# Altium PCB water_heating_new.PcbDoc
Units mm, origin at the board's own origin, x right, y up, seen from the top; angles counter-clockwise.
Board outline 33.27 x 58.67 mm, 2 copper layers (Top Layer, Bottom Layer); 14 components, 15 nets, 65 pads, 29 vias.
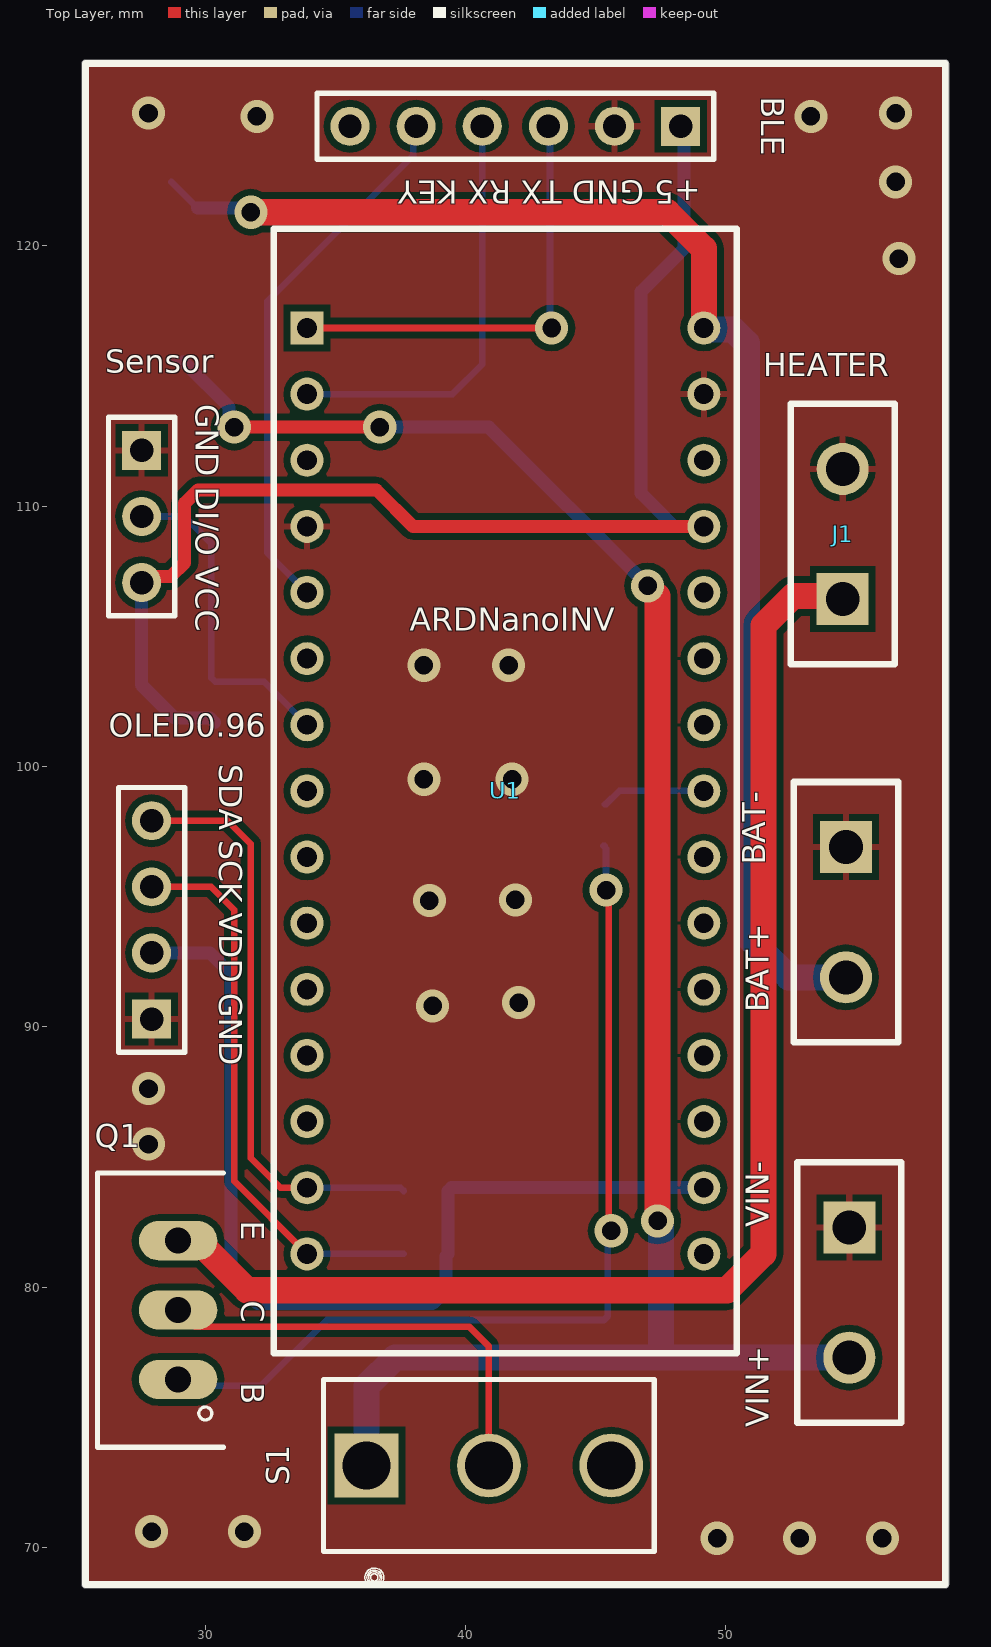
[diagram p0: Top Layer view]
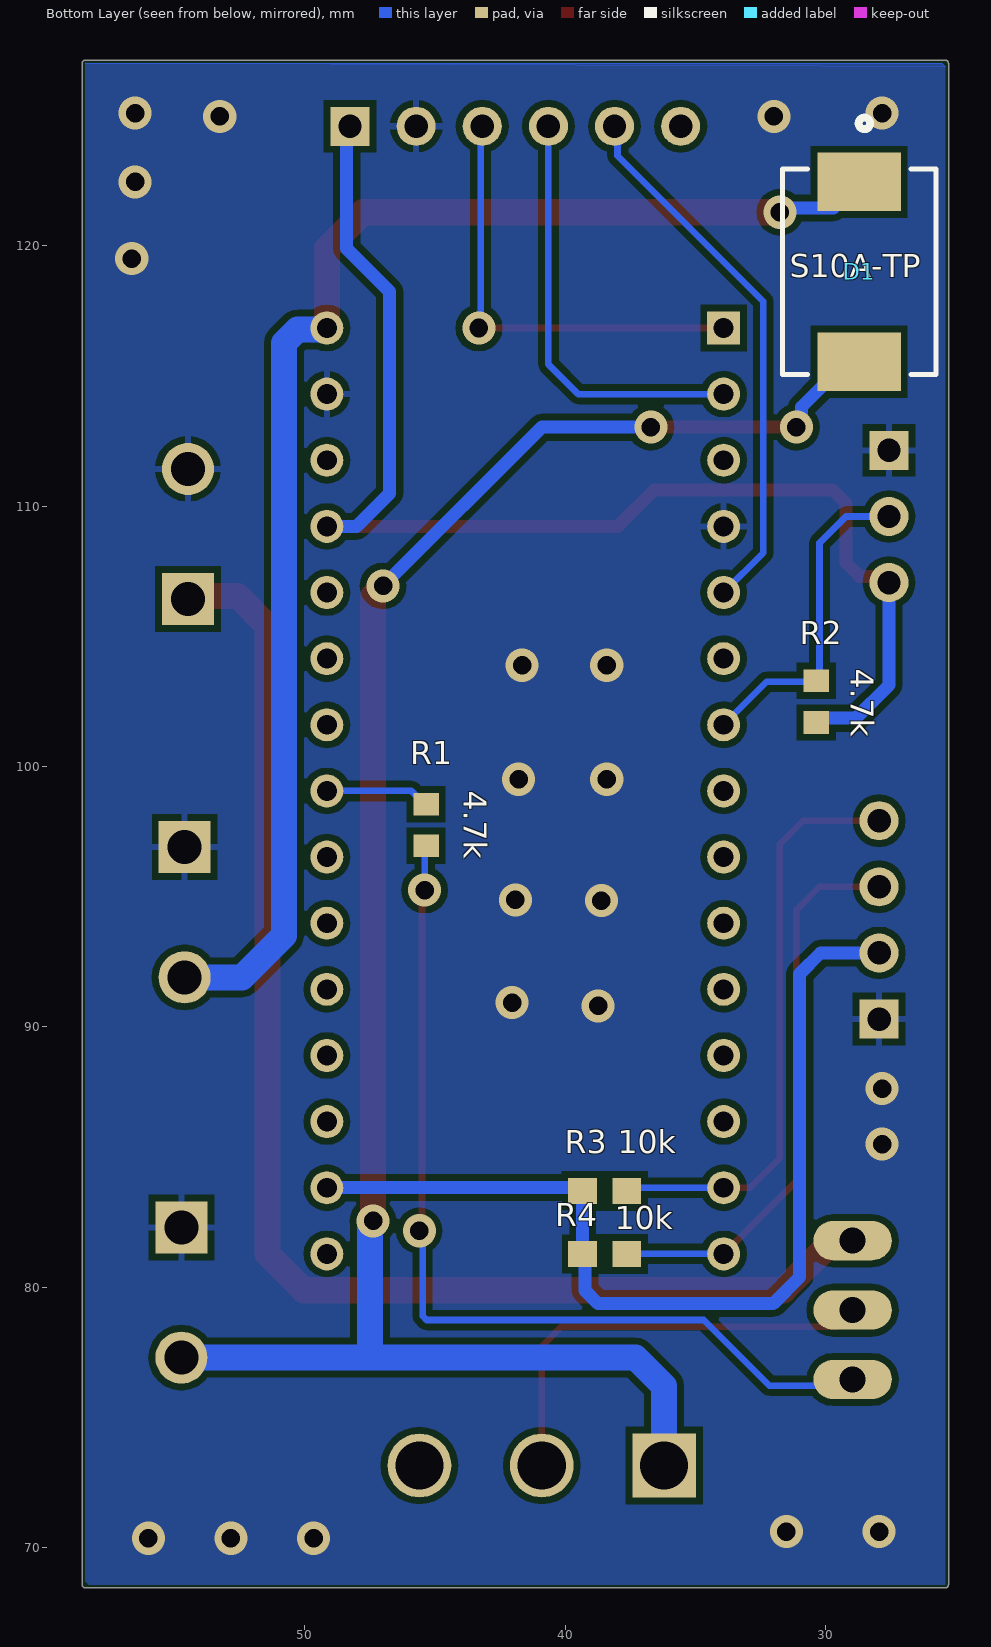
[diagram p1: Bottom Layer view, seen from below]

## Layer stack, top to bottom
Top Solder: solder mask 0.0102, Solder Resist, Dk 3.5
Top Layer: signal copper 0.0356
Dielectric 1: dielectric 0.32, FR-4, Dk 4.8
Bottom Layer: signal copper 0.0356
Bottom Solder: solder mask 0.0102, Solder Resist, Dk 3.5

## Board outline
25.4,68.453 cw(c25.4,68.58) 25.273,68.58 25.273,127 cw(c25.4,127) 25.4,127.127 58.42,127.127 cw(c58.42,127) 58.547,127 58.547,68.58 cw(c58.42,68.58) 58.42,68.453

## Design rules (kind name [scope] priority, off if disabled: settings)
Clearance [All] p1: gap=0.254 ignorepadtopadclearanceinfootprint=FALSE except(0: Arc-Hole Track-Hole SMDPad-Hole THPad-Hole Via-Hole Fill-Hole Poly-Hole Region-Hole Text-Hole)
PolygonConnect [All] p1: connectstyle=Relief reliefconductorwidth=0.254 reliefentries=4 polygonreliefangle="90 Angle" airgapwidth=0.254
RoutingVias [All] p1: holewidth=0.711 width=1.27 viastyle="Through Hole" minholewidth=0.711 minwidth=1.27 maxholewidth=0.711 maxwidth=1.27
SolderMaskExpansion [All] p1: expansion=0.102
Width [All] p1: maxlimit=1 minlimit=0.254 preferedwidth=0.254 minimp=50.000000 maximp=50.000000 favimp=50.000000
30 further rules are at their usual default settings.

## Classes and differential pairs
component class water_heating_new: BAT- BLE D1 J1 OLED0.96 Q1 R1 R2 R3 R4 S1 Sensor VIN-

## Components (designator, comment, footprint, x,y, rotation, side; value= is the part's Value field where it differs from the comment)
BAT- "BAT+" WJ301V-5.0-2P 54.61,96.901 r270 top value=BAT (schematic designator J2)
BLE "+5 GND TX RX KEY" HDR1X6 48.26,124.587 r180 top (schematic designator J3)
D1 "S10A-TP" *DIOM8059X265N 28.702,118.999 r270 bottom
J1 "HEATER" WJ301V-5.0-2P 54.483,106.426 r90 top value=Heater
OLED0.96 "SDA SCK VDD GND" HDR1X4 27.94,90.297 r90 top (schematic designator J6)
Q1 "E      C      B" TO-220 28.956,79.121 r90 top
R1 "4.7k" *RESC1608X55N 45.339,97.752 r90 bottom
R2 "4.7k" *RESC1608X55N 30.353,102.489 r270 bottom
R3 "10k" *0603 38.481,83.693 r0 bottom value=10K
R4 "10k" *0603 38.481,81.28 r0 bottom value=10K
S1 "1101M2S3CQE2" *SW_1101M2S3CQE2 40.894,73.152 r90 top
Sensor "GND DI/O VCC" HDR1X3 27.559,112.141 r270 top (schematic designator J4)
U1 "ARDNanoINV" ARDNanoInv 33.909,116.84 r0 top
VIN- "VIN+" WJ301V-5.0-2P 54.737,82.296 r270 top value=VIN (schematic designator J5)

## Footprints (in the part's own frame and the unit in brackets; to place one, negate y for a bottom-side part, rotate by r counter-clockwise, add the part's x,y. Pads: shape width x height; smd on the part's side, far side on the other; paste and mask are expansions set on the pad)
*0603 [mm]
  rect 1.1x1 smd: 1(-0.85,0) 2(0.85,0)
*DIOM8059X265N [mm]
  rect 2.25x3.2 smd: 1(-3.45,0) 2(3.45,0)
  silkscreen extent -5.92,-2.95 3.95,2.95
*RESC1608X55N [mm]
  rect 0.87x0.98 smd: 1(-0.8,0) 2(0.8,0)
*SW_1101M2S3CQE2 [mm]
  rect 2.45x2.45 hole 1.85: 1(0,4.7)
  round 2.45 hole 1.85: 2(0,0) 3(0,-4.7)
  silkscreen extent -4.66,-6.35 3.3,6.35
ARDNanoInv [mil]
  rect 50x50 hole 30: 1(0,0)
  round 50 hole 30: 2(0,-100) 3(0,-200) 4(0,-300) 5(0,-400) 6(0,-500) 7(0,-600) 8(0,-700) 9(0,-800) 10(0,-900) 11(0,-1000) 12(0,-1100) 13(0,-1200) 14(0,-1300) 15(0,-1400) 16(600,-1400) 17(600,-1300) 18(600,-1200) 19(600,-1100) 20(600,-1000) 21(600,-900) 22(600,-800) 23(600,-700) 24(600,-600) 25(600,-500) 26(600,-400) 27(600,-300) 28(600,-200) 29(600,-100) 30(600,0)
  silkscreen extent -50,-1550 650,150
HDR1X3 [mm] "Connector; Header; 3 Position"
  rect 1.5x1.5 hole 0.9: 1(0,0)
  round 1.5 hole 0.9: 2(2.54,0) 3(5.08,0)
  silkscreen extent -1.27,-1.27 6.35,1.27
HDR1X4 [mm] "Connector; Header; 4 Position"
  rect 1.5x1.5 hole 0.9: 1(0,0)
  round 1.5 hole 0.9: 2(2.54,0) 3(5.08,0) 4(7.62,0)
  silkscreen extent -1.27,-1.27 8.89,1.27
HDR1X6 [mm] "Connector; Header; 6 Position"
  rect 1.5x1.5 hole 0.9: 1(0,0)
  round 1.5 hole 0.9: 2(2.54,0) 3(5.08,0) 4(7.62,0) 5(10.16,0) 6(12.7,0)
  silkscreen extent -1.27,-1.27 13.97,1.27
TO-220 [mm]
  oval 1.508x3.016 hole 1: B(-2.665,0) C(0,0) E(2.665,0)
  silkscreen extent -5.27,-1.74 5.27,3.1
WJ301V-5.0-2P [mm]
  rect 2x2 hole 1.3: 1(0,0)
  round 2 hole 1.3: 2(5,0)
  silkscreen extent -2.5,-2 7.5,2

## Part data
BAT- J1 VIN-: library part WJ301V-5.0-2P, "P=5.0mm Screw terminal RoHS", MF="Ningbo Kangnex Elec", MP=WJ301V-5.0-2P
BLE: library part "Header 6", "Header, 6-Pin", LatestRevisionDate=17-Jul-2002, LatestRevisionNote="Re-released for DXP Platform.", Publisher="Altium Limited"
D1: "Diode Standard 50V 10A Surface Mount DO-214AB (HSMC)", Mfr="Micro Commercial Co", Digikeynumber=S10A-TPMSTR-ND, MP=S10A-TP
OLED0.96: library part "Header 4", "Header, 4-Pin", LatestRevisionDate=17-Jul-2002, LatestRevisionNote="Re-released for DXP Platform.", Publisher="Altium Limited"
Q1: library part MJF6388G, "Bipolar (BJT) Transistor NPN - Darlington 100V 10A  2W Through Hole TO-220FP", MF="ON Semiconductor", MP=MJF6388G, Price=None
R1 R2: library part ERJ-3EKF1472V, "Res Thick Film 1.6 x 0.8 mm 14.7K Ohm 1% 0.1W_1/10W_ 100ppm/ C Molded SMD Punched Carrier T/R", Package="1608 Panasonic Electronic Components", Digi-Key_Part_Number=P14.7KHCT-ND, Digi-Key_Purchase_URL=https://www.digikey.com.au/product-detail/en/panasonic-electronic-components/ERJ-3EKF1472V/P14.7KHCT-ND/198164?utm_source=snapeda&utm_medium=aggregator&utm_campaign=symbol, MF=Panasonic, MP=ERJ-3EKF1472V, SnapEDA_Link=https://www.snapeda.com/parts/ERJ-3EKF1472V/Panasonic/view-part/923197/?ref=snap
R3 R4: library part RC0603JR-0710KL, "RES SMD 10K OHM 5% 1/10W 0603", Digi-Key Part Number=311-10KGRTR-ND, MF=Yageo, MP=RC0603JR-0710KL
S1: "Slide Switch SPDT Through Hole", Package=None, Availability=Unavailable, MF=C&K, MP=1101M2S3CQE2, Price=None, SnapEDA_Link=https://www.snapeda.com/parts/1101M2S3CQE2/C%26K/view-part/287375/?ref=snap
Sensor: library part "Header 3", "Header, 3-Pin", LatestRevisionDate=17-Jul-2002, LatestRevisionNote="Re-released for DXP Platform.", Publisher="Altium Limited"

## Via types
v1: diameter 1.27, hole 0.711, Top Layer to Bottom Layer, 29 vias

## Nets (pads, with @x,y where several pads share a name; then routed paths per layer and width w, separated by ;. In a path a pad name is that pad's centre, name@x,y a point inside that pad or via, vN(x,y) a via of type N, cw(c..) or ccw(c..) an arc to the next point about the centre after c; other vN are vias at no path point)
+3V3: OLED0.96.2 R3.2 R4.2 U1.17 | length 37.6
  Bottom Layer w0.254: R4.2@39.243,81.192 R4.2 ; R3.2 R3.2@39.458,83.82
  Bottom Layer w0.5: OLED0.96.2 30.187,92.837 30.988,92.036 30.988,80.391 32.008,79.371 38.735,79.371 39.243,79.879 R4.2@39.243,81.192 ; R4.2 R3.2 ; R3.2@39.458,83.82 U1.17
+5V: BLE.1 R2.2 Sensor.3 U1.27 | length 50.1
  Top Layer w0.5: Sensor.3 27.797,107.299 28.686,107.299 29.21,107.823 29.21,110.109 29.718,110.617 36.576,110.617 37.973,109.22 U1.27 ; BLE.1 BLE.1@48.387,124.46
  Bottom Layer w0.5: Sensor.3 27.559,103.124 28.829,101.854 30.188,101.854 R2.2 ; BLE.1@48.387,124.46 48.387,119.888 46.736,118.237 46.736,110.49 48.006,109.22 U1.27
BT_KEY: BLE.5 U1.5 | length 20.9
  Top Layer w0.254: BLE.5@37.985,124.472 BLE.5
  Bottom Layer w0.254: U1.5 32.385,108.204 32.385,117.856 37.985,123.456 BLE.5@37.985,124.472
BT_RX: BLE.4 U1.2 | length 15.8
  Bottom Layer w0.254: U1.2@34.417,114.3 39.497,114.3 40.64,115.443 BLE.4
BT_TX: BLE.3 U1.1 | length 17.2
  Top Layer w0.254: U1.1 v1(43.307,116.84)
  Bottom Layer w0.254: BLE.3 43.243,124.523 43.243,116.903 v1(43.307,116.84)
GND: BAT-.1 BLE.2 J1.2 OLED0.96.1 Sensor.1 U1.4 U1.29 VIN-.1
  other v1: 49.657,70.358 52.832,70.358 56.007,70.358 27.94,70.612 31.502,70.612 27.821,85.494 27.821,87.63 38.729,90.805 42.037,90.932 38.608,94.846 41.91,94.877 38.4,99.508 41.783,99.508 38.4,103.886 41.653,103.886 56.642,119.507 56.515,122.449 31.982,124.968 53.261,124.968 27.821,125.095 56.515,125.095
MISO: OLED0.96.3 R4.1 U1.15 | length 21.6
  Top Layer w0.254: OLED0.96.3 30.226,95.377 31.115,94.488 31.115,84.074 U1.15
  Bottom Layer w0.254: U1.15 R4.1
MOSI: OLED0.96.4 R3.1 U1.14 | length 22.7
  Top Layer w0.254: OLED0.96.4 30.861,97.917 31.75,97.028 31.75,84.963 32.893,83.82 U1.14
  Bottom Layer w0.254: U1.14 37.504,83.82 R3.1
NetJ1_1: J1.1 Q1.E | length 51.5
  Top Layer w0.254: Q1.E Q1.E@29.71,81.786
  Top Layer w1: Q1.E@29.71,81.786 31.613,79.883 50.038,79.883 51.435,81.28 51.435,105.41 52.578,106.553 54.356,106.553 J1.1
NetQ1_B: Q1.B R1.1 | length 35.9
  Top Layer w0.254: v1(45.394,95.25) 45.494,95.151 45.494,82.268 v1(45.593,82.169)
  Bottom Layer w0.254: Q1.B 29.196,76.216 32.147,76.216 34.671,78.74 45.317,78.74 45.466,78.889 45.466,81.915 v1@45.339,82.042 ; R1.1 45.284,96.952 45.394,96.842 v1(45.394,95.25)
NetQ1_C: Q1.C S1.2 | length 17.1
  Top Layer w0.254: Q1.C 29.591,78.486 40.132,78.486 40.894,77.724 S1.2
NetR1_2: R1.2 U1.23 | length 4
  Bottom Layer w0.254: R1.2 45.394,98.552 45.902,99.06 U1.23
TEMP: R2.1 Sensor.2 U1.7 | length 12.7
  Bottom Layer w0.254: Sensor.2 29.21,109.601 30.226,108.585 30.226,103.416 R2.1 30.391,103.251 32.258,103.251 U1.7
VBAT: BAT-.2 D1.1 U1.30 | length 53.7
  Top Layer w1: v1(31.75,121.285) 47.752,121.285 49.149,119.888 U1.30
  Bottom Layer w0.254: D1.1 D1.1@29.7,121.451 ; v1@31.584,121.451 v1(31.75,121.285)
  Bottom Layer w0.5: D1.1@29.7,121.451 v1@31.584,121.451
  Bottom Layer w1: U1.30 49.201,116.788 50.266,116.788 50.8,116.254 50.8,93.505 52.404,91.901 BAT-.2
VIN: D1.2 S1.1 VIN-.2 | length 73.5
  Top Layer w0.5: v1@30.861,113.03 v1(31.115,113.03) v1(36.703,113.03)
  Top Layer w1: v1(47.371,82.55) v1@47.371,106.553
  Bottom Layer w0.254: D1.2 D1.2@29.177,115.549 ; v1@30.921,113.224 v1(31.115,113.03)
  Bottom Layer w0.5: D1.2@29.177,115.549 30.921,113.805 v1@30.921,113.224 ; v1(36.703,113.03) 40.894,113.03 v1(46.99,106.934)
  Bottom Layer w1: S1.1 36.194,76.199 37.291,77.296 47.498,77.296 ; v1@47.498,82.296 47.498,77.296 ; VIN-.2 47.498,77.296
pads on no net: BLE.6 S1.3 U1.3 U1.6 U1.8 U1.9 U1.10 U1.11 U1.12 U1.13 U1.16 U1.18 U1.19 U1.20 U1.21 U1.22 U1.24 U1.25 U1.26 U1.28

## Polygon pours and split planes (outlines as drawn)
GND on Bottom Layer "GND_L02_P-001" (solid, pour order 12): 25.527,127 25.4,126.873 25.4,68.58 58.293,68.58 58.42,68.707 58.42,127
GND on Bottom Layer "Bottom Layer-GND" (solid, pour order 6): 58.42,127 25.527,127 25.4,126.873
GND on Bottom Layer "Bottom Layer-GND 1" (solid, pour order 2): 61.595,126.365
GND on Top Layer "GND_L02_P-001" (solid, pour order 14): 25.4,127 25.4,68.58 58.42,68.58 58.42,127

## Silkscreen, mask and mechanical layers (free items; w line width, h text height)
Top Overlay:
  lines w0.254: 25.4,68.58 58.42,68.58 58.42,127 25.4,127 25.4,68.58